# Altium PCB Flame68.pcbdoc (part 2 of 2)
Units mil, origin at the board's own origin, x right, y up, seen from the top; angles counter-clockwise.
Board outline 13330 x 5150 mil, 2 copper layers (Top Layer, Bottom Layer); 224 components, 167 nets, 1114 pads, 151 vias.
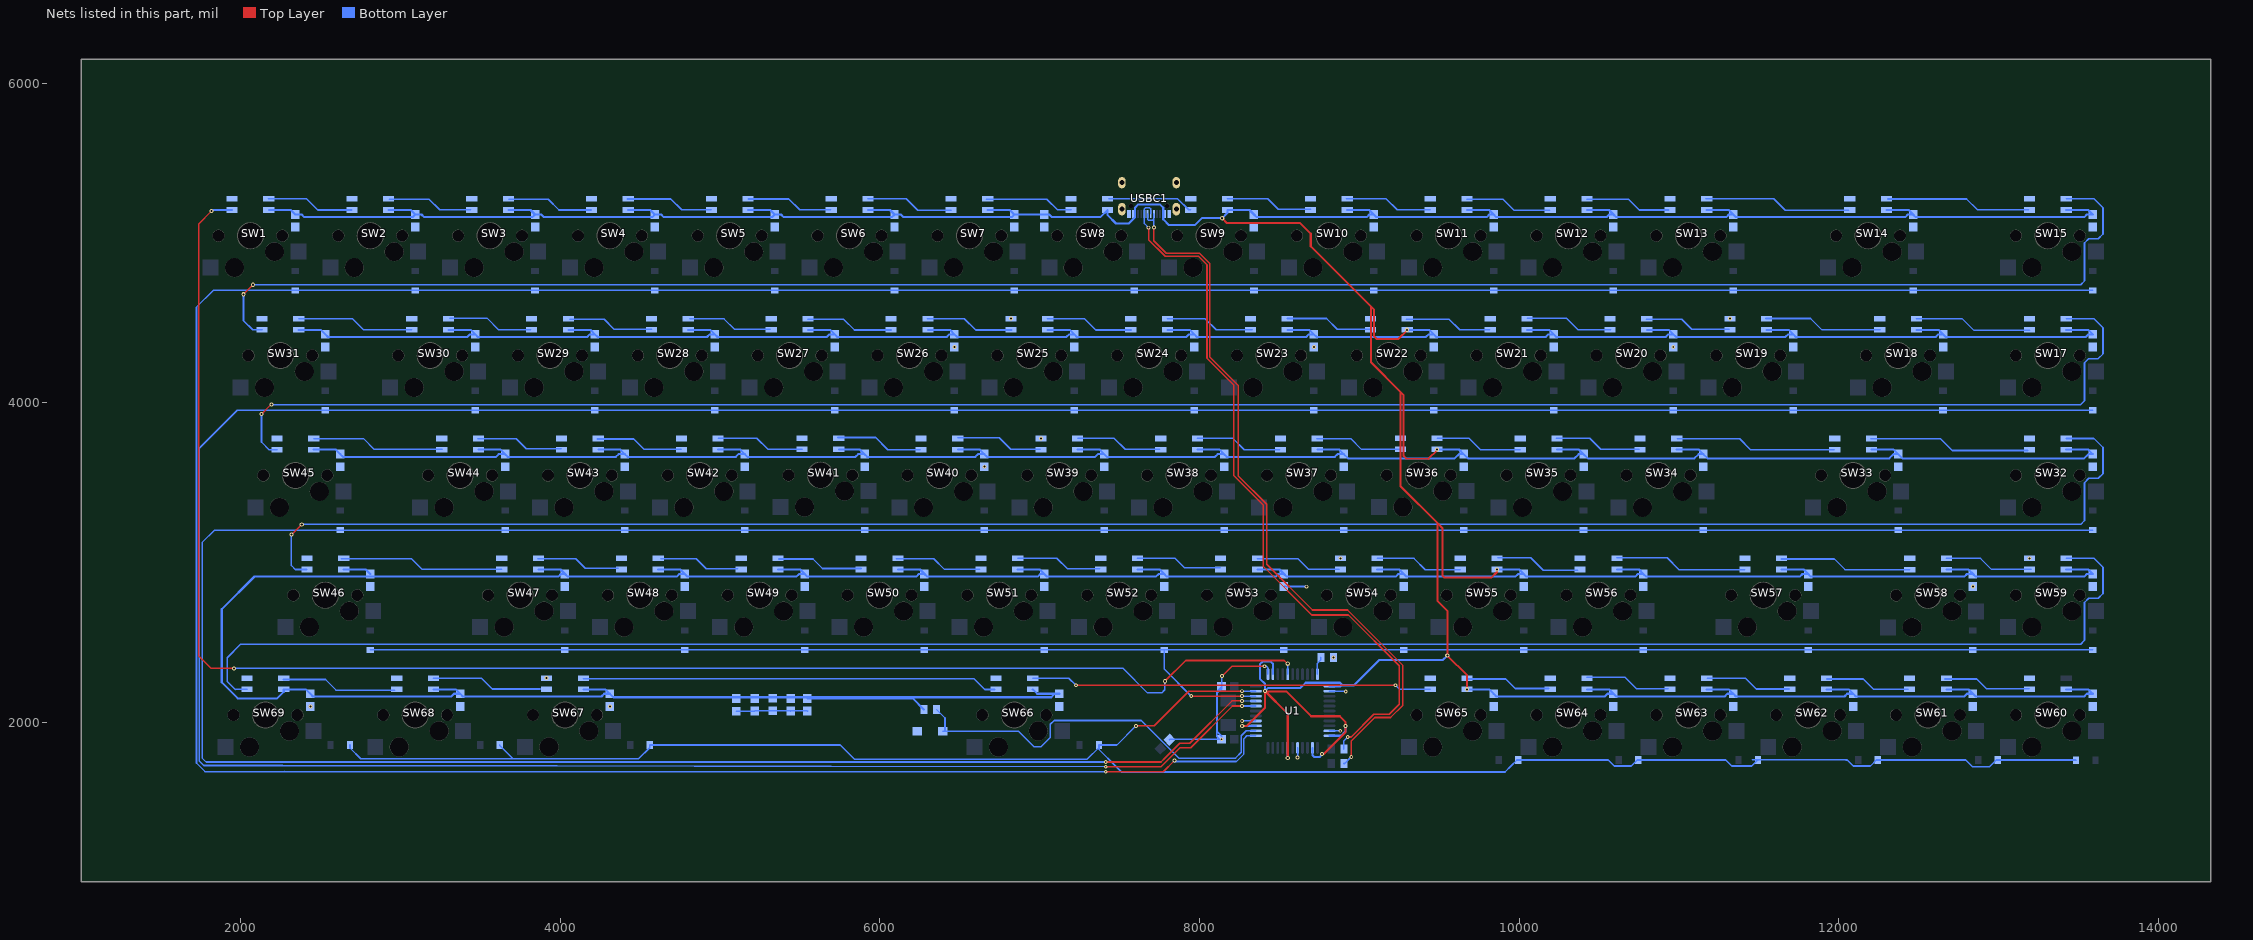
[diagram p2: the nets of this part, all layers, seen from the top]

## Via types
v1: diameter 24.02, hole 12, Top Layer to Bottom Layer, tented both sides, 129 vias
v2: diameter 26, hole 13, Top Layer to Bottom Layer, tented both sides, 21 vias
v3: diameter 26, hole 14, Top Layer to Bottom Layer, tented both sides, 1 vias

## Nets (pads, with @x,y where several pads share a name; then routed paths per layer and width w, separated by ;. In a path a pad name is that pad's centre, name@x,y a point inside that pad or via, vN(x,y) a via of type N, cw(c..) or ccw(c..) an arc to the next point about the centre after c; other vN are vias at no path point) (continued)
GND: C1.1 C2.2 C3.2 C4.1 C5.1 C6.1 C7.1 C8.1 C9.2 C10.2 C11.2 C12.2 C13.2 C14.2 C15.2 C16.2 C17.2 C18.2 C19.2 C20.2 C21.2 C22.2 C23.2 C25.2 C26.2 C27.2 C28.2 C29.2 C30.2 C31.2 C32.2 C33.2 C34.2 C35.2 C36.2 C37.2 C38.2 C39.2 C40.2 C41.2 C42.2 C43.2 C44.2 C45.2 C46.2 C47.2 C48.2 C49.2 C50.2 C51.2 C52.2 C53.2 C54.2 C55.2 C56.2 C57.2 C58.2 C59.2 C60.2 C61.2 C62.2 C63.2 C64.2 C65.2 C66.2 C67.2 C68.2 C69.2 C70.2 C71.2 C72.2 C73.2 C74.2 C75.2 C76.2 C77.2 KEY1.1 R2.2 SW1.5 SW2.5 SW3.5 SW4.5 SW5.5 SW6.5 SW7.5 SW8.5 SW9.5 SW10.5 SW11.5 SW12.5 SW13.5 SW14.5 SW15.5 SW17.5 SW18.5 SW19.5 SW20.5 SW21.5 SW22.5 SW23.5 SW24.5 SW25.5 SW26.5 SW27.5 SW28.5 SW29.5 SW30.5 SW31.5 SW32.5 SW33.5 SW34.5 SW35.5 SW36.5 SW37.5 SW38.5 SW39.5 SW40.5 SW41.5 SW42.5 SW43.5 SW44.5 SW45.5 SW46.5 SW47.5 SW48.5 SW49.5 SW50.5 SW51.5 SW52.5 SW53.5 SW54.5 SW55.5 SW56.5 SW57.5 SW58.5 SW59.5 SW60.5 SW61.5 SW62.5 SW63.5 SW64.5 SW65.5 SW66.5 SW67.5 SW68.5 SW69.5 U1.5 U1.15 U1.23 U1.35 U1.43 USBC1.0 USBC1.1 USBC1.2 USBC1.3 USBC1.A1 USBC1.A12 USBC1.B1 USBC1.B12 | length 2376.8
  Top Layer w10: v1(8141,2288) 8203,2350 v1(8406,2350)
  Bottom Layer w10: C4.1@5100.6,2068.83 5213.64,2068.83 C5.1@5215.2,2070.38 5326.76,2070.39 C6.1@5327.83,2071.46 5438.97,2071.46 C7.1@5440.19,2070.23 C8.1@5546,2070.63 C8.1@5547.61,2069.03 ; C1.1@7811.84,1889.84 7815.01,1893 v1(8138.63,1893) ; v1(8141,2288) 8138.63,2285.63 C3.2@8138.63,2225 ; v1@8267,2008 U1.15@8352.63,2008 ; v1(8406,2350) 8418,2350 8428,2340 U1.23@8428,2300.37 ; C61.2@8528.4,2849.05 8667.95,2849.05 v1(8669,2848) ; v1(8614,1779) U1.5@8614,1839.63 ; U1.43@8813.37,1946 v1(8881,1946) ; U1.35@8813.37,2194 8913,2194 v1(8915,2192) ; v1(8138.63,1893) 8138.63,1912.37 8111,1940 8111,2182 8138.63,2209.63 C3.2@8138.63,2225 ; v1(8138.63,1893) 8124,1893 8107,1910 8107,2192 8138.63,2223.63 C3.2@8138.63,2225
  other v1: 8267,2007 2434.52,2099.04 4309.56,2099.04 3913.3,2275.72 8838.37,2405 12840.99,2849.05 8882.16,3025.73 13194.75,3025.73 6653.36,3599.07 7007.12,3775.75 6467,4348 8715.9,4349.08 10965,4349 6819.62,4525.77 11319.71,4525.77
R0: D1.1 D2.1 D3.1 D4.1 D5.1 D6.1 D7.1 D8.1 D9.1 D10.1 D11.1 D12.1 D13.1 D14.1 D15.1 U1.12 | length 21578.9
  Top Layer w10: v1(7413,1690) 7773,1690 v1(7843,1760)
  Bottom Layer w10: 2273.5,1694 2277.5,1690 v1(7413,1690) ; 2274,1691 1775,1691 1722,1744 1722,4598 1826.4,4702.4 D1.1@2340.77,4702.44 ; D1.1@2340.77,4702.44 D15.1@13591.01,4702.44 ; v1(7843,1760) 7843,1754 8231,1754 8278,1801 8278,1897 8296,1915 U1.12@8352.63,1915
R1: D17.1 D18.1 D19.1 D20.1 D21.1 D22.1 D23.1 D24.1 D25.1 D26.1 D27.1 D28.1 D29.1 D30.1 D31.1 U1.18 | length 20689
  Top Layer w10: v1(7413,1721) 7759,1721 7878,1840 7945,1840 8206,2101 v1(8266,2101)
  Bottom Layer w10: D31.1@2528.27,3952.43 D17.1@13591.01,3952.43 ; D31.1@2528.27,3952.43 1977.4,3952.4 1740,3715 1740,1757 1768,1729 2262,1729 v1(7413,1721) ; v1(8266,2101) U1.18@8352.63,2101
R1_2: KEY1.2 R1.2 U1.13 | length 2500.7
  Bottom Layer w10: R1.2@6354.37,2079 6407,2026.37 KEY1.2@6407,1944 ; KEY1.2@6393.12,1944 6866,1944 6868,1942 6964.5,1846.5 7008.5,1846.5 7066.5,1904.5 7066.5,1986.5 7090.5,2010.5 7635.5,2010.5 7870.5,1775.5 8155.5,1775.5 8225.5,1775.5 8261.5,1811.5 8261.5,1888.5 8262,1915 8292,1946 8312,1946 U1.13@8352.63,1946
R2: D32.1 D33.1 D34.1 D35.1 D36.1 D37.1 D38.1 D39.1 D40.1 D41.1 D42.1 D43.1 D44.1 D45.1 U1.19 | length 19981
  Top Layer w10: v1(7413,1751) 7759,1751 7782,1774 7876,1868 7942,1868 7942,1872 8203,2133 v1(8265,2133)
  Bottom Layer w10: v1(7413,1751) 2266,1751 1782,1751 1757,1776 1757,3124 1835.4,3202.4 D45.1@2622.02,3202.41 D32.1@13591.01,3202.41 ; v1(8265,2133) U1.19@8352.63,2132
R2_1: R2.1 U1.33 | length 113.6
  Bottom Layer w10: U1.33@8738,2300.37 8738,2368 8759.63,2389.63 R2.1@8759.63,2405
R3: D46.1 D47.1 D48.1 D49.1 D50.1 D51.1 D52.1 D53.1 D54.1 D55.1 D56.1 D57.1 D58.1 D59.1 U1.20 | length 11545.7
  Top Layer w10: v1(7948,2163) v1(8265,2163)
  Bottom Layer w10: D46.1@2809.53,2452.39 D59.1@13591.01,2452.39 ; D52.1@7778.38,2452.39 7778.38,2332.62 v1(7948,2163) ; v1(8265,2163) U1.20@8352.63,2163
R3_1: R3.1 USBC1.A6 USBC1.B6 | length 4661.2
  Top Layer w10: v1(7714.16,5096) 7714.2,5012.8 7792,4935 8000,4935 8063,4872 8063,4287 8228,4122 8243,4107 8243,4104 8243,3541 8420,3364 8420,2989 8707,2702 8926,2702 9273,2355 9273,2106 9196,2029 9097,2029 8950,1882 v1(8950,1783)
  Bottom Layer w10: USBC1.A6@7674.79,5181.22 7674.79,5148.21 7682,5141 7707,5141 7714.16,5148.16 USBC1.B6@7714.16,5181.22 v1(7714.16,5096) ; R3.1@8903.23,1741.49 8908.49,1741.49 v1(8950,1783)
R4: D60.1 D61.1 D62.1 D63.1 D64.1 D65.1 D66.1 D67.1 D68.1 D69.1 U1.21 | length 12495.9
  Top Layer w10: v1(7603,1977) 7716,1977 7933,2194 v1(8266,2194)
  Bottom Layer w10: D69.1@2683,1857.1 2683,1838 2750,1771 3703,1771 ; D68.1@3620.6,1857.1 3620.6,1853.4 3703,1771 ; D66.1@7370.65,1857.15 7483.15,1857.15 v1(7603,1977) ; 7510,1688 9908,1688 9912,1688 9951,1727 9987.4,1763.4 D65.1@9995.7,1763.4 10557.6,1763.4 10595,1726 10702,1726 10739.4,1763.4 D64.1@10745.72,1763.4 11293.6,1763.4 11331,1726 11457,1726 11494.4,1763.4 D63.1@11495.74,1763.4 ; 7510,1690 7475.5,1724.5 7370.6,1829.4 7370.6,1857.1 7370.6,1841.6 7298,1769 5839,1769 5750.9,1857.1 4558.1,1857.1 4558.1,1840.1 4489,1771 3703,1771 ; v1(8266,2194) U1.21@8352.63,2194 ; 11461,1764 12041.27,1763.6 ; 12045,1763 12054,1763 12091,1726 12199,1726 12236.4,1763.4 D62.1@12245.75,1763.4 ; D62.1@12245.75,1763.4 12795.6,1763.4 12838,1721 12945,1721 12987.4,1763.4 D61.1@12995.77,1763.4 13483.57,1763.4 D60.1@13485.98,1761
R4_2: R4.2 USBC1.A7 USBC1.B7 | length 4589
  Top Layer w10: v1(7681,5095) 7681,5020 7785,4916 7994,4916 8047,4863 8047,4277 8214,4110 8214,3544 8400,3358 8400,2989 8400,2974 8703,2671 8932,2671 9250,2353 9250,2112 9187,2049 9091,2049 8949,1907 v1(8928,1907)
  Bottom Layer w10: v1(7681,5095) 7655.1,5120.9 USBC1.B7@7655.1,5181.22 7655.1,5214.1 7662,5221 7687,5221 7694.47,5213.53 USBC1.A7@7694.47,5181.22 ; R4.2@8903.37,1832 8903.37,1882.37 v1(8928,1907)
RGB0: SW1.6 U1.27 | length 10049.4
  Top Layer w10: v2(1816,5199) 1737,5120 1737,2413 1813,2337 v2(1956,2337) ; v2(7783,2256) 7913,2386 8530,2386 8550,2366 v2(8552,2366)
  Bottom Layer w10: v2(1816,5199) 1822.78,5205.78 SW1.6@1944.51,5205.78 ; v2(1956,2337) 7521,2337 7675,2183 7763,2183 7783,2203 v2(7783,2256) ; U1.27@8552,2300.37 v2(8552,2366)
RGB1: SW15.2 SW31.6 | length 12657.2
  Top Layer w10: v2(2016,4678) 2016,4679 v2(2075,4738)
  Bottom Layer w10: v2(2016,4678) 2016,4512 2073.8,4455.8 SW31.6@2132.02,4455.77 ; v2(2075,4738) 12548,4738 13515,4738 13539,4762 13539,4999 13566,5026 13626,5026 13655,5055 13655,5219 13598.2,5275.8 SW15.2@13424.7,5275.8
RGB2: SW17.2 SW45.6 | length 12530.1
  Top Layer w10: v2(2129,3928) 2188.99,3987.99 v2(2191,3987.99)
  Bottom Layer w10: v2(2129,3928) 2129,3753 2176.3,3705.8 SW45.6@2225.77,3705.75 ; v2(2191,3987.99) 12548,3987.99 13515,3987.99 13539,4011.99 13539,4248.99 13566,4275.99 13626,4275.99 13655,4304.99 13655,4468.99 13598.2,4525.79 SW17.2@13424.7,4525.79
  other v2: 2191,3987.99
RGB3: SW32.2 SW46.6 | length 12356.2
  Top Layer w10: v2(2316,3174) 2379.97,3237.97 v2(2381,3237.97)
  Bottom Layer w10: v2(2316,3174) 2316,2980 2342,2954 2343.73,2955.73 SW46.6@2413.27,2955.74 ; v2(2381,3237.97) 12548,3237.97 13515,3237.97 13539,3261.97 13539,3498.97 13566,3525.97 13626,3525.97 13655,3554.97 13655,3718.97 13598.2,3775.77 SW32.2@13424.7,3775.77
RGB4: SW59.2 SW69.6 | length 12759.5
  Bottom Layer w10: SW69.6@2038.26,2205.72 1965.7,2205.7 1964,2204 1914,2254 1914,2404 1997.9,2488 12548,2488 ; 12548,2487.95 13515,2487.95 13539,2511.95 13539,2748.95 13566,2775.95 13626,2775.95 13655,2804.95 13655,2968.95 13598.2,3025.75 SW59.2@13424.7,3025.75
SW1_2: SW1.2 SW2.6 | length 551.5
  Bottom Layer w10: SW1.2@2171.1,5275.1 2412.5,5275.1 2481.8,5205.8 SW2.6@2693.9,5205.8
SW2_2: SW2.2 SW3.6 | length 537.8
  Bottom Layer w10: SW2.2@2929.8,5273.8 3176.8,5273.8 3243.8,5206.8 SW3.6@3439.8,5206.8
SW3_2: SW3.2 SW4.6 | length 542.8
  Bottom Layer w10: SW3.2@3677.8,5272.8 3923.8,5272.8 3990.8,5205.8 SW4.6@4192.8,5205.8
SW4_2: SW4.2 SW5.6 | length 551.2
  Bottom Layer w10: SW4.2@4419.8,5274.8 4690.8,5274.8 4758.8,5206.8 SW5.6@4942.8,5206.8
SW5_2: SW5.2 SW6.6 | length 544.2
  Bottom Layer w10: SW5.2@5176.8,5274.8 5429.8,5274.8 5497.8,5206.8 SW6.6@5692.8,5206.8
SW6_2: SW6.2 SW7.6 | length 549.8
  Bottom Layer w10: SW6.2@5924.8,5275.8 6164.8,5275.8 6236.8,5203.8 SW7.6@6444.8,5203.8
SW7_2: SW7.2 SW8.6 | length 559.8
  Bottom Layer w10: SW7.2@6664.8,5273.8 7043.8,5273.8 7110.8,5206.8 SW8.6@7196.8,5206.8
SW8_2: SW8.2 SW9.6 | length 541.6
  Bottom Layer w10: SW8.2@7431.8,5275.8 7862.8,5275.8 7931.8,5206.8 SW9.6@7944.8,5206.8
SW9_2: SW9.2 SW10.6 | length 548.3
  Bottom Layer w10: SW9.2@8173.8,5275.8 8426.8,5275.8 8492.8,5209.8 SW10.6@8694.8,5209.8
SW10_2: SW10.2 SW11.6 | length 552.6
  Bottom Layer w10: SW10.2@8919.8,5275.8 9167.8,5275.8 9236.8,5206.8 SW11.6@9443.8,5206.8
SW11_2: SW11.2 SW12.6 | length 548.6
  Bottom Layer w10: SW11.2@9671.8,5273.8 9899.8,5273.8 9968.8,5204.8 SW12.6@10191.8,5204.8
SW12_2: SW12.2 SW13.6 | length 540.5
  Bottom Layer w10: SW12.2@10424.1,5274.3 10683.4,5274.3 10751.9,5205.7 SW13.6@10936.2,5205.7
SW13_2: SW13.2 SW14.6 | length 924.3
  Bottom Layer w10: SW13.2@11169.4,5276.8 11593.4,5276.8 11665.7,5204.6 SW14.6@12063.8,5204.6
SW14_2: SW14.2 SW15.6 | length 910.9
  Bottom Layer w10: SW14.2@12306.4,5274.9 12800.9,5274.9 12867.5,5208.3 SW15.6@13189.7,5208.3
SW17_6: SW17.6 SW18.2 | length 737.8
  Bottom Layer w10: SW18.2@12486.9,4524 12774.9,4524 12846.9,4452 SW17.6@13194.9,4452
SW18_6: SW18.6 SW19.2 | length 746.1
  Bottom Layer w10: SW19.2@11544.2,4526.7 11824.2,4526.7 11893.5,4457.3 SW18.6@12261.5,4457.3
SW19_6: SW19.6 SW20.2 | length 546.6
  Bottom Layer w10: SW20.2@10794.9,4522.7 11017.5,4522.7 11081.5,4458.6 SW19.6@11314.9,4458.7
SW20_6: SW20.6 SW21.2 | length 551.1
  Bottom Layer w10: SW21.2@10052.2,4529.3 10294.9,4529.3 10366.9,4457.3 SW20.6@10573.5,4457.3
SW21_6: SW21.6 SW22.2 | length 548.9
  Bottom Layer w10: SW22.2@9294.9,4522.7 9561.5,4522.7 9628.2,4456 SW21.6@9816.2,4456
SW22_6: SW22.6 SW23.2 | length 551.7
  Bottom Layer w10: SW23.2@8548.2,4526.7 8794.9,4526.7 8861.5,4460 SW22.6@9072.2,4460
SW23_6: SW23.6 SW24.2 | length 557.5
  Bottom Layer w10: SW24.2@7798.9,4524 8036.2,4524 8104.2,4456 SW23.6@8328.2,4456
SW24_6: SW24.6 SW25.2 | length 555.9
  Bottom Layer w10: SW25.2@7046.9,4525.3 7280.2,4525.3 7350.9,4454.6 SW24.6@7573.5,4454.7
SW25_6: SW25.6 SW26.2 | length 556
  Bottom Layer w10: SW26.2@6296.2,4525.3 6528.2,4525.3 6598.9,4454.6 SW25.6@6822.9,4454.7
SW26_6: SW26.6 SW27.2 | length 550.8
  Bottom Layer w10: SW27.2@5546.9,4522.7 5772.2,4522.7 5840.2,4454.7 SW26.6@6069.5,4454.7
SW27_6: SW27.6 SW28.2 | length 531.1
  Bottom Layer w10: SW28.2@4809.5,4524 5024.2,4524 5089.5,4458.6 SW27.6@5313.5,4458.7
SW28_6: SW28.6 SW29.2 | length 538.7
  Bottom Layer w10: SW29.2@4058.9,4521.3 4273.5,4521.3 4334.9,4460 SW28.6@4572.2,4460
SW29_6: SW29.6 SW30.2 | length 537.3
  Bottom Layer w10: SW30.2@3306.4,4529.2 3539.7,4529.2 3611.9,4457 SW29.6@3813.8,4457
SW30_6: SW30.6 SW31.2 | length 734.7
  Bottom Layer w10: SW31.2@2361.9,4525.5 2699,4525.5 2769.3,4455.2 SW30.6@3067.5,4455.2
SW32_6: SW32.6 SW33.2 | length 1010.4
  Bottom Layer w10: SW33.2@12202.8,3774.4 12638,3774.4 12712.1,3700.3 SW32.6@13182.5,3700.3
SW33_6: SW33.6 SW34.2 | length 1011.7
  Bottom Layer w10: SW34.2@10989.9,3774.4 11380.6,3774.4 11449.1,3705.8 SW33.6@11973.2,3705.8
SW34_6: SW34.6 SW35.2 | length 545.6
  Bottom Layer w10: SW35.2@10234.3,3776.9 10442.3,3776.9 10511.3,3707.9 SW34.6@10751.3,3707.9
SW35_6: SW35.6 SW36.2 | length 551.2
  Bottom Layer w10: SW36.2@9487,3777.06 9687.14,3777.06 9759.3,3704.9 SW35.6@10008.3,3704.9
SW36_6: SW36.6 SW37.2 | length 551.8
  Bottom Layer w10: SW37.2@8733.3,3774.9 8946.3,3774.9 9014.14,3707.06 SW36.6@9257,3707.06
SW37_6: SW37.6 SW38.2 | length 544.4
  Bottom Layer w10: SW38.2@7987.3,3775.9 8209.3,3775.9 8280.3,3704.9 SW37.6@8502.3,3704.9
SW38_6: SW38.6 SW39.2 | length 540.8
  Bottom Layer w10: SW39.2@7237.4,3777.9 7465.4,3777.9 7534.7,3708.5 SW38.6@7749.4,3708.5
SW39_6: SW39.6 SW40.2 | length 543.2
  Bottom Layer w10: SW40.2@6488,3780.5 6746.7,3780.5 6818.7,3708.5 SW39.6@7001.4,3708.5
SW40_6: SW40.6 SW41.2 | length 547.5
  Bottom Layer w10: SW41.2@5734.7,3781.9 5973.4,3781.9 6049.4,3705.9 SW40.6@6250.7,3705.9
SW41_6: SW41.6 SW42.2 | length 552.4
  Bottom Layer w10: SW42.2@4989.37,3777.88 5229.37,3777.88 5300.17,3707.08 SW41.6@5512.42,3707.09
SW42_6: SW42.6 SW43.2 | length 550.5
  Bottom Layer w10: SW43.2@4230.7,3772.5 4458.7,3772.5 4522.7,3708.5 SW42.6@4754.7,3708.5
SW43_6: SW43.6 SW44.2 | length 546
  Bottom Layer w10: SW44.2@3484,3773.9 3724,3773.9 3786.7,3711.2 SW43.6@4004,3711.2
SW44_6: SW44.6 SW45.2 | length 834.9
  Bottom Layer w10: SW45.2@2454.7,3775.2 2766.7,3775.2 2834.7,3707.2 SW44.6@3261.4,3707.2
SW46_2: SW46.2 SW47.6 | length 1031.4
  Bottom Layer w10: SW46.2@2627.4,3023 3068.2,3023 3134.8,2956.3 SW47.6@3631.1,2956.3
SW47_2: SW47.2 SW48.6 | length 528.3
  Bottom Layer w10: SW47.2@3858.9,3023 4096,3023 4155.2,2963.7 SW48.6@4362.6,2963.7
SW48_2: SW48.2 SW49.6 | length 505.7
  Bottom Layer w10: SW48.2@4629.3,3023 4849.7,3023 4912.6,2960 SW49.6@5108.9,2960
SW49_2: SW49.2 SW50.6 | length 537.5
  Bottom Layer w10: SW49.2@5368.2,3021.2 5581.1,3021.2 5640.4,2961.9 SW50.6@5881.1,2961.9
SW50_2: SW50.2 SW51.6 | length 549.8
  Bottom Layer w10: SW50.2@6103.4,3023 6336.7,3023 6403.4,2956.3 SW51.6@6625.6,2956.3
SW51_2: SW51.2 SW52.6 | length 540.7
  Bottom Layer w10: SW51.2@6862.6,3026.7 7107.1,3026.7 7173.7,2960 SW52.6@7375.6,2960
SW52_2: SW52.2 SW53.6 | length 543.8
  Bottom Layer w10: SW52.2@7610.8,3026.7 7846,3026.7 7907.1,2965.6 SW53.6@8129.3,2965.6
SW53_2: SW53.2 SW54.6 | length 541.6
  Bottom Layer w10: SW53.2@8360.8,3023 8616.3,3023 8681.1,2958.2 SW54.6@8875.6,2958.2
SW54_2: SW54.2 SW55.6 | length 549.6
  Bottom Layer w10: SW54.2@9112.6,3024.9 9342.2,3024.9 9412.6,2954.5 SW55.6@9633,2954.5
SW55_2: SW55.2 SW56.6 | length 532.2
  Bottom Layer w10: SW55.2@9866.3,3028.6 10073.7,3028.6 10151.5,2950.8 SW56.6@10366.3,2950.8
SW56_2: SW56.2 SW57.6 | length 832.5
  Bottom Layer w10: SW56.2@10610.8,3028.6 10927.4,3028.6 11001.5,2954.5 SW57.6@11412.6,2954.5
SW57_2: SW57.2 SW58.6 | length 830.2
  Bottom Layer w10: SW57.2@11642.2,3021.2 11973.7,3021.2 12039.84,2955.06 SW58.6@12445,2955.06
SW58_2: SW58.2 SW59.6 | length 558.7
  Bottom Layer w10: SW58.2@12675,3025.06 12888.34,3025.06 12957.1,2956.3 SW59.6@13205.2,2956.3
SW60_6: SW60.6 SW61.2 | length 553.1
  Bottom Layer w10: SW61.2@12664.6,2270.4 12864.6,2270.4 12925.7,2209.3 SW60.6@13192.4,2209.3
SW61_6: SW61.6 SW62.2 | length 537.9
  Bottom Layer w10: SW62.2@11925.7,2270.4 12153.5,2270.4 12218.3,2205.6 SW61.6@12436.8,2205.6
SW62_6: SW62.6 SW63.2 | length 541.4
  Bottom Layer w10: SW63.2@11177.5,2276 11416.4,2276 11485,2207.4 SW62.6@11690.5,2207.4
SW63_6: SW63.6 SW64.2 | length 539.2
  Bottom Layer w10: SW64.2@10423.8,2281.5 10662.7,2281.5 10734.9,2209.3 SW63.6@10933.1,2209.3
SW64_6: SW64.6 SW65.2 | length 533.9
  Bottom Layer w10: SW65.2@9677.5,2270.4 9916.4,2270.4 9975.7,2211.1 SW64.6@10186.8,2211.1
SW65_6: SW65.6 SW66.2 | length 2517.8
  Top Layer w10: v1(7227,2231) v1(9227,2231)
  Bottom Layer w10: SW66.2@6955.86,2275.72 7182.28,2275.72 v1(7227,2231) ; v1(9227,2231) 9252.28,2205.72 SW65.6@9444.67,2205.72
SW66_6: SW66.6 SW67.2 | length 2601.7
  Bottom Layer w10: SW67.2@4143.3,2271.5 6588.5,2271.5 6655.2,2204.8 SW66.6@6717.4,2204.8
SW67_6: SW67.6 SW68.2 | length 697
  Bottom Layer w10: SW68.2@3204.5,2274.3 3505.8,2274.3 3572.5,2207.6 3873.9,2207.6
SW68_6: SW68.6 SW69.2 | length 724.7
  Bottom Layer w10: SW69.2@2266.4,2266.9 2529.6,2266.9 2595.4,2201.1 SW68.6@2963.8,2201.1
VCC: C4.2 C5.2 C6.2 C7.2 C8.2 C9.1 C10.1 C11.1 C12.1 C13.1 C14.1 C15.1 C16.1 C17.1 C18.1 C19.1 C20.1 C21.1 C22.1 C23.1 C25.1 C26.1 C27.1 C28.1 C29.1 C30.1 C31.1 C32.1 C33.1 C34.1 C35.1 C36.1 C37.1 C38.1 C39.1 C40.1 C41.1 C42.1 C43.1 C44.1 C45.1 C46.1 C47.1 C48.1 C49.1 C50.1 C51.1 C52.1 C53.1 C54.1 C55.1 C56.1 C57.1 C58.1 C59.1 C60.1 C61.1 C62.1 C63.1 C64.1 C65.1 C66.1 C67.1 C68.1 C69.1 C70.1 C71.1 C72.1 C73.1 C74.1 C75.1 C76.1 C77.1 R1.1 SW1.1 SW2.1 SW3.1 SW4.1 SW5.1 SW6.1 SW7.1 SW8.1 SW9.1 SW10.1 SW11.1 SW12.1 SW13.1 SW14.1 SW15.1 SW17.1 SW18.1 SW19.1 SW20.1 SW21.1 SW22.1 SW23.1 SW24.1 SW25.1 SW26.1 SW27.1 SW28.1 SW29.1 SW30.1 SW31.1 SW32.1 SW33.1 SW34.1 SW35.1 SW36.1 SW37.1 SW38.1 SW39.1 SW40.1 SW41.1 SW42.1 SW43.1 SW44.1 SW45.1 SW46.1 SW47.1 SW48.1 SW49.1 SW50.1 SW51.1 SW52.1 SW53.1 SW54.1 SW55.1 SW56.1 SW57.1 SW58.1 SW59.1 SW60.1 SW61.1 SW62.1 SW63.1 SW64.1 SW65.1 SW66.1 SW67.1 SW68.1 SW69.1 U1.2 U1.7 U1.14 U1.24 U1.34 U1.44 USBC1.A4 USBC1.A9 USBC1.B4 USBC1.B9 | length 77720.3
  Top Layer w13: v2(8142,5154) 8172,5124 8630,5124 8696,5058 8696,4979 9074,4601 ; v2(8267,1976) 8295,1976 8410,2091 v2(8410,2195) ; v3(8552,1776) 8552,2053 v2(8410,2195) ; v2(8766,1801) 8778,1801 8914,1937 8914,1976 v2(8913,1977) 8913,2002 8878,2037 8699,2037 8545,2191 8414,2191 v2(8410,2195) ; v2(9299.66,4455.77) 9299.66,4453.19 9244.49,4398.02 9107.49,4400.02 9091,4417 9091,4584 9074,4601 ; v2(9487.17,3705.75) 9487.17,3703.17 9432,3648 9295,3650 9278,3667 9278,4047 9259,4066 ; v2(9674.67,2205.72) 9674.67,2293.33 v2(9551,2417) 9551,2697 9490,2758 9490,3244 ; v2(9862.18,2955.73) 9862.2,2940.2 9828,2906 9531,2906 9522,2915 9522,3212 9490,3244 ; 9074,4601 9074,4251 9259,4066 ; 9259,4066 9259,3475 9490,3244
  Bottom Layer w13: SW1.1@2174.51,5205.78 2312.83,5205.78 C9.1@2340.77,5177.84 2380.16,5177.84 2397,5161 3073.95,5161 C10.1@3090.78,5177.84 ; SW69.1@2268.26,2205.72 2406.57,2205.72 C77.1@2434.52,2177.78 2451.3,2161 3317,2161 3333.78,2177.78 C76.1@3372.04,2177.78 ; SW69.1@2268.26,2205.72 2268.3,2190.3 2227,2149 1980,2149 1880,2249 1880,2707 2085,2912 2883.95,2911 ; SW31.1@2362.02,4455.77 2500.32,4455.77 C39.1@2528.27,4427.83 2545.09,4411 3417,4411 3433.82,4427.82 C38.1@3465.79,4427.83 ; SW45.1@2455.77,3705.75 2594.08,3705.75 C53.1@2622.02,3677.81 2638.83,3661 3597,3661 3613.81,3677.81 C52.1@3653.3,3677.81 ; C54.1@2826.3,2911 3987,2911 4003.8,2927.8 C55.1@4028.3,2927.8 ; SW2.1@2924.53,5205.78 3062.84,5205.78 C10.1@3090.78,5177.84 ; SW68.1@3205.78,2205.72 3344.1,2205.72 C76.1@3372.04,2177.78 ; SW30.1@3299.54,4455.77 3437.84,4455.77 C38.1@3465.79,4427.83 ; SW44.1@3487.04,3705.75 3625.35,3705.75 C52.1@3653.3,3677.81 ; SW3.1@3674.54,5205.78 3812.86,5205.78 C11.1@3840.8,5177.84 ; SW47.1@3862.05,2955.74 4000.36,2955.73 C55.1@4028.3,2927.8 ; SW29.1@4049.55,4455.77 4187.86,4455.77 C37.1@4215.81,4427.83 ; SW67.1@4143.3,2205.72 4281.62,2205.72 C75.1@4309.56,2177.78 4273.77,2177.78 4257,2161 3388.82,2161 C76.1@3372.04,2177.78 ; SW43.1@4237.06,3705.75 4375.37,3705.75 C51.1@4403.31,3677.81 ; C75.1@4309.56,2177.78 4331.3,2156 7072,2156 7093.8,2177.8 C74.1@7122.12,2177.78 6983.8,2177.78 SW66.1@6955.86,2205.72 ; SW4.1@4424.56,5205.78 4562.88,5205.78 C12.1@4590.82,5177.84 ; SW48.1@4612.06,2955.74 4750.38,2955.73 C56.1@4778.32,2927.8 ; SW28.1@4799.57,4455.77 4937.88,4455.77 C36.1@4965.82,4427.83 ; SW42.1@4987.07,3705.75 5125.39,3705.75 C50.1@5153.33,3677.81 ; SW5.1@5174.58,5205.78 5312.89,5205.78 C13.1@5340.83,5177.84 ; SW49.1@5362.08,2955.74 5500.4,2955.73 C57.1@5528.34,2927.8 ; C8.2@5546,2149.37 6205.26,2149.37 R1.1@6275.63,2079 ; SW27.1@5549.58,4455.77 5687.89,4455.77 C35.1@5715.84,4427.83 ; SW41.1@5742.42,3707.09 5874.07,3707.08 C49.1@5903.34,3677.81 ; SW6.1@5924.59,5205.78 6062.91,5205.78 C14.1@6090.85,5177.84 ; SW50.1@6112.1,2955.74 6250.41,2955.73 C58.1@6278.35,2927.8 6243.79,2927.79 6227,2911 5545.13,2911 C57.1@5528.34,2927.8 ; C58.1@6278.35,2927.8 6295.1,2911 6987,2911 7003.8,2927.8 C59.1@7028.37,2927.8 ; SW26.1@6299.6,4455.77 6437.91,4455.77 C34.1@6465.86,4427.83 ; SW40.1@6487.1,3705.75 6625.42,3705.75 C48.1@6653.36,3677.81 ; SW7.1@6674.61,5205.78 6812.92,5205.78 C15.1@6840.86,5177.84 ; SW51.1@6862.11,2955.74 7000.43,2955.73 C59.1@7028.37,2927.8 7045.16,2911 7727,2911 7743.79,2927.79 C60.1@7778.38,2927.8 ; C16.1@7028.37,5177.84 C15.1@6840.86,5177.84 ; C16.1@7028.37,5177.84 7060.2,5177.8 7077,5161 7377,5161 ; SW25.1@7049.62,4455.77 7187.93,4455.77 C33.1@7215.87,4427.83 ; SW39.1@7237.12,3705.75 7375.43,3705.75 C47.1@7403.38,3677.81 ; 7375.31,5161 7379.84,5161 SW8.1@7424.62,5205.78 7424.6,5173.4 7477,5121 7557,5121 7596,5160 USBC1.B9@7596.05,5181.22 7596,5220.1 7617,5241 7752,5241 7773.2,5219.8 USBC1.B4@7773.21,5181.23 7773.2,5146.8 7809,5111 7971,5111 8015,5155 v2@8142,5155 ; SW52.1@7612.13,2955.74 7750.44,2955.73 C60.1@7778.38,2927.8 ; SW24.1@7799.63,4455.77 7937.94,4455.77 C32.1@7965.89,4427.83 ; SW38.1@7987.14,3705.75 8125.45,3705.75 C46.1@8153.39,3677.81 ; v2(8142,5154) 8174.64,5186.64 SW9.1@8174.64,5205.78 8312.95,5205.78 C17.1@8340.9,5177.84 8357.74,5161 9047,5161 9063.84,5177.84 C18.1@9090.91,5177.84 9062.97,5205.78 SW10.1@8924.66,5205.78 ; v2(8267,1976) 8268,1977 U1.14@8352.63,1977 ; SW53.1@8362.14,2955.74 8500.46,2955.73 C61.1@8528.4,2927.8 ; U1.24@8459,2300.37 8459,2366 8445,2380 8395,2380 8378,2363 8378,2273 8410,2241 v2(8410,2195) 8430,2215 8632,2215 8664,2247 8775,2247 8880,2247 8887,2240 8887,2231 ; SW23.1@8549.65,4455.77 8687.96,4455.77 C31.1@8715.9,4427.83 ; v3(8552,1776) U1.7@8552,1839.63 ; U1.2@8707,1839.63 8707,1794 8720,1781 8751,1781 8766,1796 v2(8766,1801) ; SW37.1@8737.15,3705.75 8875.47,3705.75 C45.1@8903.41,3677.81 ; U1.44@8813.37,1915 8886,1915 8914,1943 v2@8914,1977 ; U1.34@8813.37,2225 8872,2225 8881,2225 8887,2231 ; C18.1@9090.91,5177.84 9107.8,5161 9797,5161 9813.8,5177.8 C19.1@9840.93,5177.84 ; SW54.1@9112.16,2955.74 9250.48,2955.73 C62.1@9278.42,2927.8 ; v2(9299.66,4455.77) 9437.97,4455.77 C30.1@9465.92,4427.83 ; SW36.1@9487,3707.06 9624.17,3707.06 C44.1@9653.42,3677.81 ; v2(9551,2417) 9523,2389 9125,2389 8967,2231 8887,2231 ; v2(9674.67,2205.72) 9812.98,2205.72 C73.1@9840.93,2177.78 9857.7,2161 10537,2161 10553.77,2177.78 C72.1@10590.94,2177.78 ; SW11.1@9674.67,5205.78 9812.99,5205.78 C19.1@9840.93,5177.84 9857.77,5161 10547,5161 10563.84,5177.84 C20.1@10590.94,5177.84 ; v2(9862.18,2955.73) 10000.49,2955.73 C63.1@10028.43,2927.8 9993.79,2927.79 9977,2911 9295.21,2911 C62.1@9278.42,2927.8 ; C63.1@10028.43,2927.8 10045.2,2911 10727,2911 10743.8,2927.8 C64.1@10778.5,2927.8 ; SW21.1@10049.68,4455.77 10187.99,4455.77 C29.1@10215.94,4427.83 ; SW35.1@10237.18,3705.75 10375.5,3705.75 C43.1@10403.44,3677.81 ; SW64.1@10424.69,2205.72 10563,2205.72 C72.1@10590.94,2177.78 ; SW12.1@10424.69,5205.78 10563,5205.78 C20.1@10590.94,5177.84 ; SW56.1@10612.19,2955.74 10750.51,2955.73 C64.1@10778.45,2927.8 10795.24,2911 11757,2911 11773.79,2927.79 C65.1@11809.72,2927.8 ; SW20.1@10799.7,4455.77 10938,4455.77 C28.1@10965.95,4427.83 ; SW34.1@10987.2,3705.75 11125.51,3705.75 C42.1@11153.46,3677.81 ; SW63.1@11174.7,2205.72 11313.01,2205.72 C71.1@11340.96,2177.78 ; SW13.1@11174.7,5205.78 11313.02,5205.78 C21.1@11340.96,5177.84 ; SW19.1@11549.71,4455.77 11688.02,4455.77 C27.1@11715.97,4427.83 ; SW57.1@11643.46,2955.74 11781.78,2955.73 C65.1@11809.72,2927.8 ; SW62.1@11924.72,2205.72 12063.03,2205.72 C70.1@12090.98,2177.78 ; SW33.1@12205.98,3705.75 12344.29,3705.75 C41.1@12372.23,3677.81 ; SW14.1@12299.73,5205.78 12438.04,5205.78 C22.1@12465.98,5177.84 ; SW18.1@12487.23,4455.77 12625.54,4455.77 C26.1@12653.49,4427.83 ; SW61.1@12674.74,2205.72 12813.05,2205.72 C69.1@12840.99,2177.78 ; SW58.1@12675,2955.06 12813.73,2955.06 C66.1@12840.99,2927.8 ; SW60.1@13424.75,2205.72 13563.06,2205.72 C68.1@13591.01,2177.78 13553.77,2177.78 13537,2161 12857.77,2161 C69.1@12840.99,2177.78 ; SW59.1@13424.75,2955.74 13563.07,2955.73 C67.1@13591.01,2927.8 13553.79,2927.79 13537,2911 12857.78,2911 C66.1@12840.99,2927.8 ; SW32.1@13424.75,3705.75 13563.06,3705.75 C40.1@13591.01,3677.81 13563.81,3677.81 13537,3651 12399.04,3651 C41.1@12372.23,3677.81 ; SW17.1@13424.75,4455.77 13563.07,4455.76 C25.1@13591.01,4427.83 13563.82,4427.82 13547,4411 12670.31,4411 C26.1@12653.49,4427.83 ; SW15.1@13424.75,5205.78 13563.07,5205.78 C23.1@13591.01,5177.84 13553.84,5177.84 13537,5161 12482.82,5161 C22.1@12465.98,5177.84 ; 2781.59,2955.73 C54.1@2809.53,2927.8 2781.59,2955.73 ; 2781.59,2955.73 SW46.1@2643.27,2955.74 2781.59,2955.73 ; C10.1@3090.78,5177.84 3130.16,5177.84 3147,5161 3823.96,5161 C11.1@3840.8,5177.84 ; C38.1@3465.79,4427.83 3482.61,4411 4167,4411 4183.82,4427.82 C37.1@4215.81,4427.83 ; C52.1@3653.3,3677.81 3670.1,3661 4347,3661 4363.81,3677.81 C51.1@4403.31,3677.81 ; C11.1@3840.8,5177.84 3880.16,5177.84 3897,5161 4573.98,5161 C12.1@4590.82,5177.84 ; C55.1@4028.3,2927.8 4045.09,2911 4727,2911 4743.79,2927.79 C56.1@4778.32,2927.8 ; C37.1@4215.81,4427.83 4232.63,4411 4917,4411 4933.82,4427.82 C36.1@4965.82,4427.83 ; C51.1@4403.31,3677.81 4420.12,3661 5097,3661 5113.81,3677.81 C50.1@5153.33,3677.81 ; C12.1@4590.82,5177.84 4630.16,5177.84 4647,5161 5323.99,5161 C13.1@5340.83,5177.84 ; C56.1@4778.32,2927.8 4795.11,2911 5477,2911 5493.79,2927.79 C57.1@5528.34,2927.8 ; C36.1@4965.82,4427.83 4982.65,4411 5667,4411 5683.82,4427.82 C35.1@5715.84,4427.83 ; C50.1@5153.33,3677.81 5170.14,3661 5847,3661 5863.81,3677.81 C49.1@5903.34,3677.81 ; C13.1@5340.83,5177.84 5380.16,5177.84 5397,5161 6074.01,5161 C14.1@6090.85,5177.84 ; C35.1@5715.84,4427.83 5732.66,4411 6417,4411 6433.82,4427.82 C34.1@6465.86,4427.83 ; C49.1@5903.34,3677.81 5920.15,3661 6597,3661 6613.81,3677.81 C48.1@6653.36,3677.81 ; C14.1@6090.85,5177.84 6130.16,5177.84 6147,5161 6824.02,5161 C15.1@6840.86,5177.84 ; C34.1@6465.86,4427.83 6482.68,4411 7167,4411 7183.82,4427.82 C33.1@7215.87,4427.83 ; C48.1@6653.36,3677.81 6670.17,3661 7347,3661 7363.81,3677.81 C47.1@7403.38,3677.81 ; C33.1@7215.87,4427.83 7232.69,4411 7917,4411 7933.82,4427.82 C32.1@7965.89,4427.83 ; C47.1@7403.38,3677.81 7420.18,3661 8097,3661 8113.81,3677.81 C46.1@8153.39,3677.81 ; C60.1@7778.38,2927.8 7795.18,2911 8477,2911 8493.79,2927.79 C61.1@8528.4,2927.8 ; C32.1@7965.89,4427.83 7982.71,4411 8667,4411 8683.82,4427.82 C31.1@8715.9,4427.83 ; C46.1@8153.39,3677.81 8170.2,3661 8847,3661 8863.81,3677.81 C45.1@8903.41,3677.81 ; C61.1@8528.4,2927.8 8545.19,2911 9227,2911 9243.79,2927.79 C62.1@9278.42,2927.8 ; C31.1@8715.9,4427.83 8732.73,4411 9417,4411 9433.82,4427.82 C30.1@9465.92,4427.83 ; C45.1@8903.41,3677.81 8930.22,3651 9597,3651 9623.81,3677.81 C44.1@9653.42,3677.81 9680.23,3651 10347,3651 10373.81,3677.81 C43.1@10403.44,3677.81 ; C30.1@9465.92,4427.83 9482.74,4411 10167,4411 10183.82,4427.82 C29.1@10215.94,4427.83 ; C29.1@10215.94,4427.83 10232.76,4411 10917,4411 10933.82,4427.82 C28.1@10965.95,4427.83 ; C43.1@10403.44,3677.81 10430.25,3651 11097,3651 11123.81,3677.81 C42.1@11153.46,3677.81 ; C72.1@10590.94,2177.78 10607.72,2161 11287,2161 11303.77,2177.78 C71.1@11340.96,2177.78 ; C20.1@10590.94,5177.84 10607.78,5161 11297,5161 11313.84,5177.84 C21.1@11340.96,5177.84 ; C28.1@10965.95,4427.83 10982.77,4411 11667,4411 11683.82,4427.82 C27.1@11715.97,4427.83 ; C42.1@11153.46,3677.81 11180.26,3651 12317,3651 12343.81,3677.81 C41.1@12372.23,3677.81 ; C71.1@11340.96,2177.78 11357.74,2161 12037,2161 12053.77,2177.78 C70.1@12090.98,2177.78 ; C21.1@11340.96,5177.84 11357.8,5161 12417,5161 12433.84,5177.84 C22.1@12465.98,5177.84 ; C27.1@11715.97,4427.83 11732.79,4411 12607,4411 12623.82,4427.82 C26.1@12653.49,4427.83 ; C65.1@11809.72,2927.8 11826.51,2911 12787,2911 12803.79,2927.79 C66.1@12840.99,2927.8 ; C70.1@12090.98,2177.78 12107.75,2161 12787,2161 12803.77,2177.78 C69.1@12840.99,2177.78
pads on no net: SW1. SW2. SW3. SW4. SW5. SW6. SW7. SW8. SW9. SW10. SW11. SW12. SW13. SW14. SW15. SW17. SW18. SW19. SW20. SW21. SW22. SW23. SW24. SW25. SW26. SW27. SW28. SW29. SW30. SW31. SW32. SW33. SW34. SW35. SW36. SW37. SW38. SW39. SW40. SW41. SW42. SW43. SW44. SW45. SW46. SW47. SW48. SW49. SW50. SW51. SW52. SW53. SW54. SW55. SW56. SW57. SW58. SW59. SW60. SW60.2 SW61. SW62. SW63. SW64. SW65. SW66. SW67. SW68. SW69. U1.1 U1.22 U1.25 U1.26 U1.42 USBC1. USBC1.A5 USBC1.A8 USBC1.B5 USBC1.B8

## Polygon pours and split planes (outlines as drawn)
GND on Bottom Layer (solid): 1510,5520 1510,1550 1540,1520 13780,1520 13790,1510 13790,5530 13820,5560
GND on Top Layer (solid): 1530,5540 1530,1530 1500,1500 13740,1500 13760,1520 13760,5500 13830,5570 13830,5610 13790,5650

## Silkscreen, mask and mechanical layers (free items; w line width, h text height)
Top Overlay:
  drawing of 400 lines, arcs and shapes, not listed